# Altium PCB ATGuard Simple.PcbDoc
Units mm, origin at the board's own origin, x right, y up, seen from the top; angles counter-clockwise.
Board outline 100 x 19 mm, 2 copper layers (Top Layer, Bottom Layer), stack 1.071 mm thick; 82 components, 47 nets, 256 pads, 93 vias.
Unrouted connection lines stored in the file: 117.
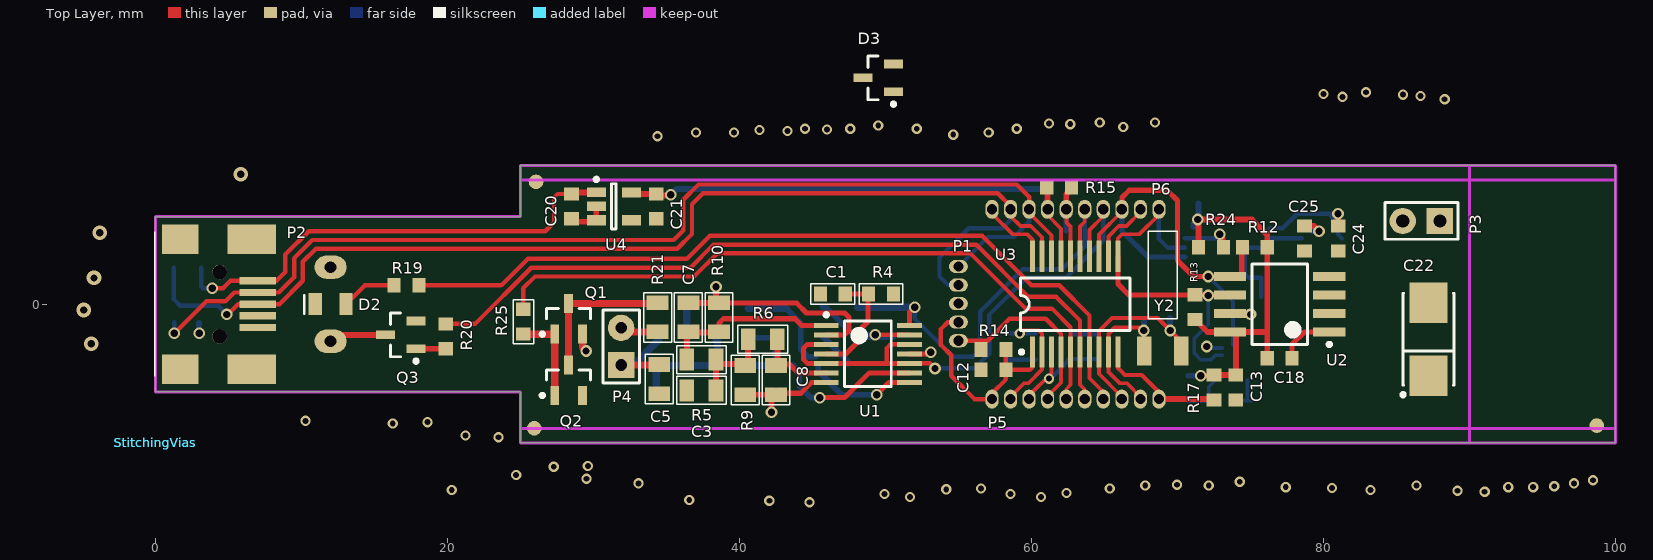
[diagram p0: Top Layer view]
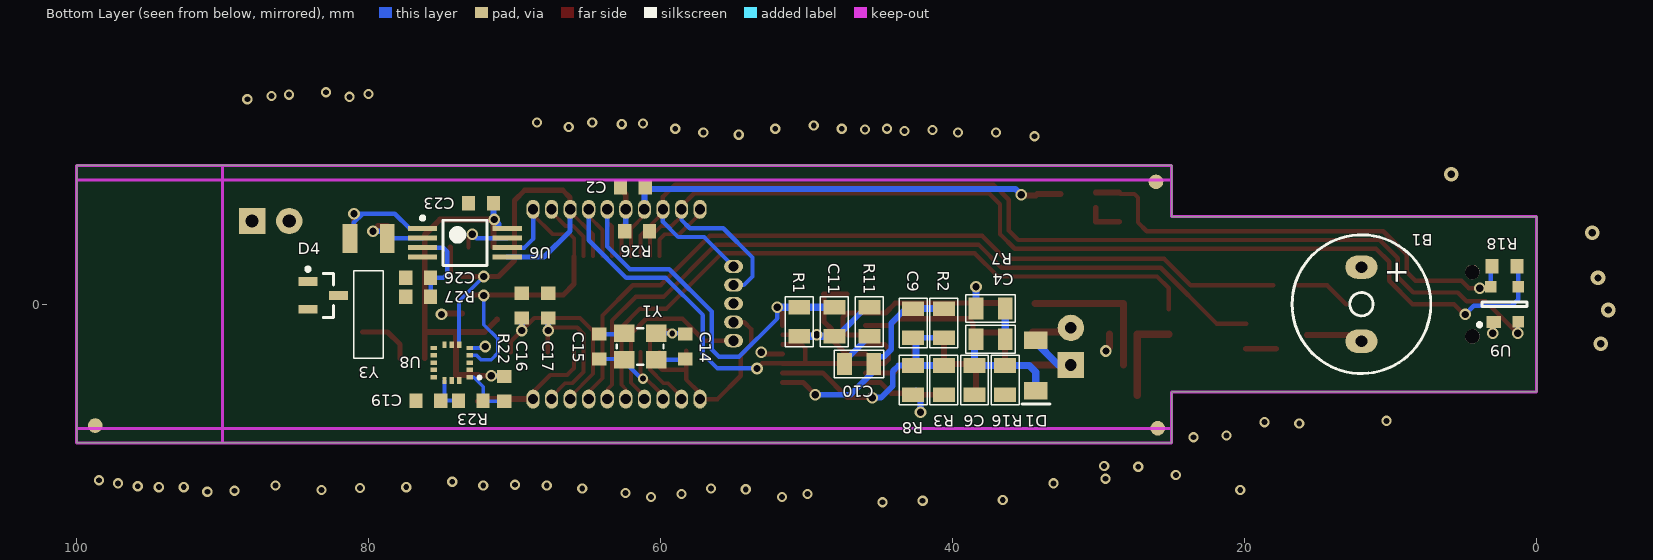
[diagram p1: Bottom Layer view, seen from below]
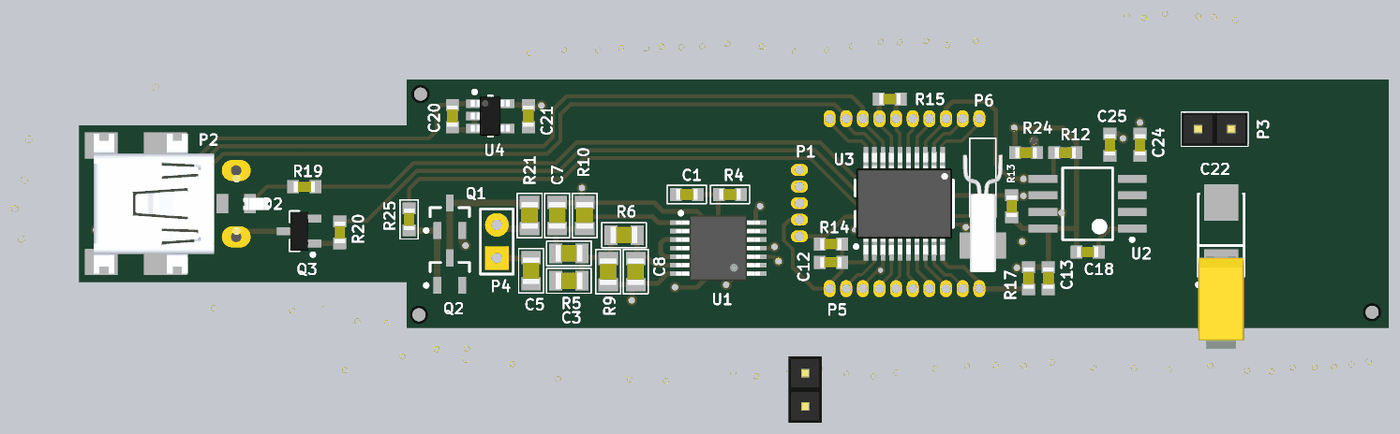
[diagram p2: 3D render of the assembled board from above, using the file's embedded part models]
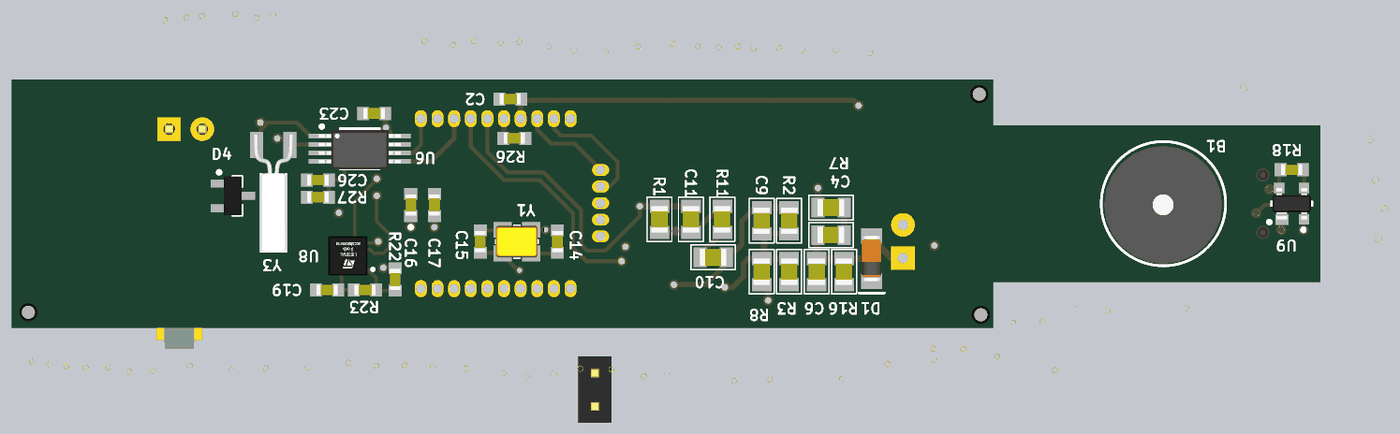
[diagram p3: 3D render of the assembled board from below, using the file's embedded part models]

## Layer stack, top to bottom
Top Layer: signal copper 0.0356
Dielectric: core 1, FR-4, Dk 4.8
Bottom Layer: signal copper 0.0356

## Board outline
0,6 25,6 25,9.5 100,9.5 100,-9.5 25,-9.5 25,-6 0,-6 0,6

## Design rules (kind name [scope] priority, off if disabled: settings)
Clearance Clearance_1 [InNamedPolygon('Direct Connect 8') Or  InNamedPolygon('Direct Connect 1') Or  InNamedPolygon('Direct Connect 11') Or  InNamedPolygon('Direct Connect 4') Or  InNamedPolygon('Direct Connect 5') Or  InNamedPolygon('Direct Connect 7') Or  InNamedPolygon('Direct Connect 10') Or  InNamedPolygon('Direct Connect 9') Or  InNamedPolygon('Direct Connect 2') Or  InNamedPolygon('Direct Connect 6') Or  InNamedPolygon('Direct Connect 3')] p1: gap=0.25
Clearance StitchingVias-Internal [InComponent('StitchingVias') vs InComponent('StitchingVias')] p2: gap=0 // Clearance between Stitching Vias
Clearance StitchingVias-Electrical [InComponent('StitchingVias') vs OnSignal] p3: gap=0 // Clearance between Stitching Vias and Electrical Objects
Clearance StitchingVias-Board [InComponent('StitchingVias') vs OnLayer('Keep-Out Layer')] p4: gap=0 // Clearance between Stitching Vias and Board Outline
Clearance [All] p5: gap=0.3
ComponentClearance StitchingVias-Comp [InComponent('StitchingVias')] p1: gap=0 collisioncheckmode=3 verticalgap=0 showdistances=FALSE // Clearance between "StitchingVias" Component and other Components
ComponentClearance [All] p2: gap=0.254 collisioncheckmode=3 verticalgap=0.254 showdistances=FALSE
HoleSize [All] p1: absolutevalues=TRUE maxlimit=2.54 minlimit=0.2 maxpercent=80.000 minpercent=20.000
HoleToHoleClearance [All] p1: gap=0.1 allowstackedmicrovias=TRUE
MinimumSolderMaskSliver [All] p1: minsoldermaskwidth=0
NetAntennae [All] p1: netantennaetolerance=0.1
PlaneClearance [All] p1: clearance=0.25
PlaneConnect StitchingVias-Plane [InComponent('StitchingVias')] p1: planeconnectstyle=Direct reliefexpansion=0.508 reliefentries=4 reliefconductorwidth=0.254 reliefairgap=0.254 // Power plane connect style rule for Stitching Vias
PlaneConnect [All] p2: planeconnectstyle=Relief reliefexpansion=0.508 reliefentries=4 reliefconductorwidth=0.254 reliefairgap=0.254
PolygonConnect PolygonConnect_3 [All vs IsNamedPolygon('Direct Connect 8') Or  IsNamedPolygon('Direct Connect 1') Or  IsNamedPolygon('Direct Connect 11') Or  IsNamedPolygon('Direct Connect 4') Or  IsNamedPolygon('Direct Connect 5') Or  IsNamedPolygon('Direct Connect 7') Or  IsNamedPolygon('Direct Connect 10') Or  IsNamedPolygon('Direct Connect 9') Or  IsNamedPolygon('Direct Connect 2') Or  IsNamedPolygon('Direct Connect 6') Or  IsNamedPolygon('Direct Connect 3')] p1: connectstyle=Direct reliefconductorwidth=0.254 reliefentries=4 polygonreliefangle="90 Angle"
PolygonConnect PolygonConnect_2 [All vs IsNamedPolygon('Top VBAT') Or  IsNamedPolygon('Bottom VBAT') Or  IsNamedPolygon('Top VBAT')] p2: connectstyle=Direct reliefconductorwidth=0.254 reliefentries=4 polygonreliefangle="90 Angle"
PolygonConnect StitchingVias-Poly [InComponent('StitchingVias')] p3: connectstyle=Direct reliefconductorwidth=0.254 reliefentries=4 polygonreliefangle="90 Angle" // Polygon connect style rule for Stitching Vias
PolygonConnect PolygonConnect_1 [All vs IsNamedPolygon('Top Full')] p4: connectstyle=Relief reliefconductorwidth=0.254 reliefentries=4 polygonreliefangle="90 Angle"
PolygonConnect [All] p5: connectstyle=Relief reliefconductorwidth=0.254 reliefentries=4 polygonreliefangle="90 Angle"
RoutingVias StitchingVias-ViaStyle [InComponent('StitchingVias')] p1: holewidth=0.4 width=0.6 viastyle="Through Hole" minholewidth=0.3 minwidth=0.5 maxholewidth=0.6 maxwidth=1 // Via style rule for Stitching Vias
RoutingVias [All] p2: holewidth=0.4 width=0.7 viastyle="Through Hole" minholewidth=0.4 minwidth=0.7 maxholewidth=0.711 maxwidth=1.27
SilkToSilkClearance [All] p1: silktosilkclearance=0
SilkscreenOverComponentPads [All] p1: minsilkscreentomaskgap=0
SolderMaskExpansion [All] p1: expansion=0
TestPointUsage [All] p1: valid=0 allowmultiple=FALSE
Testpoint [All] p1: side=15 testpointundercomponent=TRUE minsize=1.016 maxsize=2.54 preferedsize=1.524 minholesize=0 maxholesize=1.016 preferedholesize=0.813 testpointgrid=0.025 style=1023 order=0123456789
Width [All] p1: maxlimit=0.8 minlimit=0.2 preferedwidth=0.3
15 further rules are at their usual default settings.

## Classes and differential pairs
component class "AT Guard Simple Main": B1 C1 C2 C12 C13 C14 C15 C16 C17 D2 P1 P2 P5 P6 Q3 R4 R12 R13 R14 R15 R17 R18 R19 R20 R26 U3 U9 Y1 Y2
component class "AT Guard Simple Memory": C18 U2
component class "AT Guard Simple Mems": C19 R22 R23 U8
component class "AT Guard Simple Power": C20 C21 C22 D3 P3 U4
component class "AT Guard Simple RTC": C23 C24 C25 C26 D4 R24 R27 U6 Y3
component class RF_125KHz: C3 C4 C5 C6 C7 C8 C9 C10 C11 D1 P4 Q1 Q2 R1 R2 R3 R5 R6 R7 R8 R9 R10 R11 R16 R21 R25 U1

## Components (designator, comment, footprint, x,y, rotation, side; value= is the part's Value field where it differs from the comment)
B1 "Buzzer 5V r=12mm, h=7.5 mm" "Buzzer 9x5.5 mm" 12,0 r270 bottom
C1 "Cap" 3-0603_N 46.4,0.7 r0 top
C2 "Cap" 3-0603_L 61.9,8 r180 bottom
C3 "Cap" 6-0805_N 37.4,-5.9 r0 top
C4 "Cap" 6-0805_N 37.4,-2.4 r0 bottom
C5 "Cap" 6-0805_N 34.51,-5.13 r270 top
C6 "Cap" 6-0805_N 38.5,-5.2 r270 bottom
C7 "Cap" 6-0805_N 36.5,-0.9 r270 top
C8 "Cap" 6-0805_N 42.5,-5.2 r270 top
C9 "Cap" 6-0805_N 42.7,-1.3 r90 bottom
C10 "Cap" 6-0805_N 46.4,-4.1 r0 bottom
C11 "Cap" 6-0805_N 48.1,-1.2 r90 bottom
C12 "Cap" 3-0603_L 57.4,-4.5 r0 top
C13 "Cap" 3-0603_L 74,-5.7 r90 top
C14 "Cap" 3-0603_L 58.3,-2.9 r90 bottom
C15 "Cap" 3-0603_L 64.2,-2.9 r270 bottom
C16 "Cap" 3-0603_L 69.5,-0.1 r270 bottom
C17 "Cap" 3-0603_L 67.7,-0.1 r270 bottom
C18 "Cap" 3-0603_L 77,-3.7 r180 top
C19 "Cap" 3-0603_L 75.9,-6.6 r0 bottom
C20 "Cap" 3-0603_L 28.5,6.7 r90 top
C21 "Cap" 3-0603_L 34.3,6.7 r90 top
C22 "CAP-Tantal" C 87.2,-2.4 r90 top
C23 "Cap" 3-0603_L 72.3,6.9 r0 bottom
C24 "Cap" 3-0603_L 81,4.5 r90 top
C25 "Cap" 3-0603_L 78.7,4.5 r90 top
C26 "Cap" 3-0603_L 76.6,1.8 r180 bottom
D1 "LL4148" "DL-35 - S" 34.3,-4.2 r270 bottom
D2 "LED" "6-0805 - LED" 12,0 r180 top
D3 "BAT54C" SOT23_N 49.5,15.5 r180 top
D4 "BAT54C" SOT23_N 83.1,0.6 r180 bottom
P1 "Header 5pin" "Header 1.27mm 5P" 55,-2.5 r90 top
P2 "USB Mini B" "USB Mini B Female_N" -0.8,0 r270 top
P3 "Header 2H" "HDR1X2H-180 derece"#1 86.7,5.7 r180 top
P4 "Header 2H" "HDR1X2H-180 derece"#2 31.9,-2.89 r90 top
P5 "Header 10" "Header 1.27mm 10P" 57.3,-6.5 r0 top
P6 "Header 10" "Header 1.27mm 10P" 57.3,6.5 r0 top
Q1 "BSS84" SOT23_N 28.3,-1 r90 top
Q2 "2N7002" SOT23_N 28.3,-5.2 r90 top
Q3 "BC817-40" SOT23_N 16.8,-2.1 r180 top
R1 "Res1" 6-0805_N 50.5,-1.2 r90 bottom
R2 "Res1" 6-0805_N 40.6,-1.3 r270 bottom
R3 "Res1" 6-0805_N 40.6,-5.2 r270 bottom
R4 "Res1" 3-0603_N 49.7,0.7 r180 top
R5 "Res1" 6-0805_N 37.4,-3.8 r180 top
R6 "Res1" 6-0805_N 41.6,-2.4 r180 top
R7 "Res1" 6-0805_N 37.4,-0.3 r180 bottom
R8 "Res1" 6-0805_N 42.7,-5.2 r270 bottom
R9 "Res1" 6-0805_N 40.4,-5.2 r90 top
R10 "Res1" 6-0805_N 38.6,-0.9 r90 top
R11 "Res1" 6-0805_N 45.7,-1.2 r90 bottom
R12 "Res1" 3-0603_L 75.3,3.9 r0 top
R13 "Res1" 3-0603_L 71.2,-0.2 r270 top
R14 "Res1" 3-0603_L 57.4,-3.1 r0 top
R15 "Res1" 3-0603_L 61.9,8 r180 top
R16 "Res1" 6-0805_N 36.4,-5.2 r90 bottom
R17 "Res1" 3-0603_L 72.5,-5.7 r90 top
R18 "Res1" 3-0603_L 2.2,2.6 r0 bottom
R19 "Res1" 3-0603_L 17.2,1.3 r0 top
R20 "Res1" 3-0603_L 19.9,-2.2 r90 top
R21 "Res1" 6-0805_N 34.4,-0.9 r270 top
R22 "Res1" 3-0603_L 70.7,-5.8 r270 bottom
R23 "Res1" 3-0603_L 73,-6.6 r180 bottom
R24 "Res1" 3-0603_L 72.3,3.9 r0 top
R25 "Res1" 3-0603_N 25.2,-1.2 r270 top
R26 "Res1" 3-0603_L 61.6,5 r0 bottom
R27 "Res1" 3-0603_L 76.6,0.5 r180 bottom
StitchingVias "Component That Holds Stitching Vias" ? 0,-9.5 r0 top locked
StitchingVias "Component That Holds Stitching Vias" ? 0,-9.5 r0 top locked
StitchingVias "Component That Holds Stitching Vias" ? 0,-9.5 r0 top locked
StitchingVias "Component That Holds Stitching Vias" ? 0,-9.5 r0 top locked
StitchingVias "Component That Holds Stitching Vias" ? 0,-9.5 r0 top locked
U1 "#NAME?" TSSOP-14N 48.8,-3.4 r0 top
U2 "24FC1025-I/SM" SOIJ-SM8_N 77,0 r180 top
U3 "PIC18LF14K50-I/SS" SSOP-20 63,0 r0 top
U4 "TPS76933 3.3V LDO" SOT-23-CH5_M 31.4,6.7 r0 top
U6 "MCP79402" TSSOP-ST8_M 73.4,4.2 r180 bottom
U8 "LIS3DH" "LGA 16" 74.3,-4 r0 bottom
U9 "PRTR5V0U2X" SOT-143B 2.2,0 r270 bottom
Y1 "Crystal Oscillator" "3.2x2.5 mm SMD CRYSTAL" 61.4,-2.9 r0 bottom
Y2 "XTAL_SMT" "32768 SMT 2.1x6.2mm Crystal" 69,-3.2 r180 top
Y3 "XTAL_SMT" "32768 SMT 2.1x6.2mm Crystal" 80,4.5 r180 bottom

## Footprints (in the part's own frame and the unit in brackets; to place one, negate y for a bottom-side part, rotate by r counter-clockwise, add the part's x,y. Pads: shape width x height; smd on the part's side, far side on the other; paste and mask are expansions set on the pad)
3-0603_L [mm] "Chip Resistor; Body 1.6 x 0.9 mm (LxW typ)"
  rect 0.9x1 smd: 1(-0.85,0) 2(0.85,0)
  body extent -0.81,-0.41 0.81,0.41, height 0.46
3-0603_N [mm] "Chip Resistor; Body 1.6 x 0.9 mm (LxW typ)"
  rect 0.9x1 smd: 1(-0.85,0) 2(0.85,0)
  silkscreen extent -1.5,-0.7 1.5,0.7, body extent -0.81,-0.41 0.81,0.41, height 0.46
"3.2x2.5 mm SMD CRYSTAL" [mm] "3.2x2.5 mm SMD CRYSTAL"
  rect 1.4x1.2 smd: 1(-1.1,-0.9) 2(1.1,-0.9) 3(1.1,0.9) 4(-1.1,0.9)
  silkscreen extent -1.6,-1.25 1.6,1.25, body extent -1.6,-1.25 1.6,1.25, height 0.77
"6-0805 - LED" [mm] "Chip LED"
  rect 0.9x1.5 smd: 1(-1.05,0) 2(1.05,0)
  silkscreen extent 1.8,-0.6 1.8,0.65, body extent -1.03,-0.45 1.03,0.46, height 0.85
6-0805_N [mm] "Chip Resistor; Body 2 x 1.2 mm (LxW typ)"
  rect 1x1.5 smd: 1(-1,0) 2(1,0)
  silkscreen extent -1.7,-0.95 1.7,0.95, body extent -1.01,-0.63 1.01,0.64, height 0.61
"32768 SMT 2.1x6.2mm Crystal" [mm] "32768 SMT 2.1x6.2mm Crystal"
  rect 1x2 smd: 1(-1.27,0) 2(1.27,0)
  silkscreen extent -1,-8.2 1,-2.2, body extent -1.53,-8.17 1.53,0.81, height 2
"Buzzer 9x5.5 mm" [mm]
  oval 1.6x2.2 hole 0.8: 1(-2.54,0) 2(2.54,0)
  silkscreen extent -4.75,-4.75 4.75,4.75, body extent -4.41,-4.52 4.59,4.48, height 4.5
C [mm] "Capacitor, SM Tantalum; Body 6.0 x 3.2 mm (LxW typ)"
  rect 2.8x2.6 smd: 1(-2.5,0) 2(2.5,0)
  silkscreen extent -3.92,-1.75 3.15,1.87, body extent -3.8,-1.75 3.79,1.76, height 2.79
"DL-35 - S" [mm]
  rect 1.2x1.6 smd: 1(-1.725,0) 2(1.725,0)
  silkscreen extent 2.64,-0.95 2.64,0.98, body extent -1.76,-0.75 1.74,0.75, height 1.5
"HDR1X2H-180 derece"#1 [mm] "Connector; Header; 2 Position; Right Angle"
  rect 1.8x1.8 hole 0.9: 1(-1.27,0)
  round 1.8 hole 0.9: 2(1.27,0)
  silkscreen extent -2.5,-1.25 2.5,1.25, body extent -2.53,-1.28 2.55,1.26, height 8.49
"HDR1X2H-180 derece"#2 [mm] "Connector; Header; 2 Position; Right Angle"
  rect 1.8x1.8 hole 0.8: 1(-1.27,0)
  round 1.8 hole 0.8: 2(1.27,0)
  silkscreen extent -2.5,-1.25 2.5,1.25, body extent -2.53,-1.28 2.55,1.26, height 8.49
"Header 1.27mm 5P" [mm] "5 pin header 1.27mm"
  oval 0.9x1.3 hole 0.7: 1(0,0) 2(1.27,0) 3(2.54,0) 4(3.81,0) 5(5.08,0)
"Header 1.27mm 10P" [mm] "10 pin header 1.27mm"
  oval 0.9x1.3 hole 0.7: 1(0,0) 2(1.27,0) 3(2.54,0) 4(3.81,0) 5(5.08,0) 6(6.35,0) 7(7.62,0) 8(8.89,0) 9(10.16,0) 10(11.43,0)
"LGA 16" [mm] "LGA 16"
  rect 0.45x0.3 smd: 1(-1.225,1) 2(-1.225,0.5) 3(-1.225,0) 4(-1.225,-0.5) 5(-1.225,-1) 9(1.225,-1) 10(1.225,-0.5) 11(1.225,0) 12(1.225,0.5) 13(1.225,1)
  rect 0.3x0.45 smd: 6(-0.5,-1.225) 7(0,-1.225) 8(0.5,-1.225) 14(0.5,1.225) 15(0,1.225) 16(-0.5,1.225)
  silkscreen extent -2,0.93 -1.8,1.12, body extent -1.5,-1.5 1.5,1.5, height 1.01
SOIJ-SM8_N [mm] "SOP, 8-Leads, Body 5.2x5.2mm, Pitch 1.27mm, IPC Medium Density"
  rect 2.2x0.6 smd: 1(-3.4,1.905) 2(-3.4,0.635) 3(-3.4,-0.635) 4(-3.4,-1.905) 5(3.4,-1.905) 6(3.4,-0.635) 7(3.4,0.635) 8(3.4,1.905)
  silkscreen extent -3.52,-2.75 1.9,2.88, body extent -2.73,-2.75 2.73,2.75, height 2.04
SOT23_N [mm] "SOT23, 3-Leads, Body 2.9x1.3mm, Pitch 0.95mm, Lead Span 2.3mm, IPC Medium Density"
  rect 1.3x0.6 smd: 1(-1.05,0.95) 2(-1.05,-0.95) 3(1.05,0)
  silkscreen extent -1.18,-1.5 0.7,1.92, body extent -1.25,-1.5 1.25,1.5
SOT-23-CH5_M [mm] "SOT23, 6-Leads, Body 2.9x1.6mm, Pitch 0.95mm, Lead Span 2.7mm, IPC Low Density"
  rect 1.3x0.65 smd: 1(-1.2,0.95) 2(-1.2,0)
  rect 1.3x0.7 smd: 3(-1.2,-0.95) 4(1.2,-0.95) 5(1.2,0.95)
  silkscreen extent -1.32,-1.55 0.15,1.97, body extent -1.5,-1.49 1.5,1.51, height 1.3
SOT-143B [mm] "SOT143B"
  rect 0.8x1 smd: 1(1.22,-0.75)
  rect 0.8x0.8 smd: 2(1.2,0.95) 3(-1.2,0.95) 4(-1.2,-0.95)
  silkscreen extent -0.15,-1.84 1.53,1.55, body extent -1.21,-1.46 1.21,1.46, height 1
SSOP-20 [mm]
  rect 0.35x2.15 smd: 1(-2.925,-3.275) 2(-2.275,-3.275) 3(-1.625,-3.275) 4(-0.975,-3.275) 5(-0.325,-3.275) 6(0.325,-3.275) 7(0.975,-3.275) 8(1.625,-3.275) 9(2.275,-3.275) 10(2.925,-3.275) 11(2.925,3.275) 12(2.275,3.275) 13(1.625,3.275) 14(0.975,3.275) 15(0.325,3.275) 16(-0.325,3.275) 17(-0.975,3.275) 18(-1.625,3.275) 19(-2.275,3.275) 20(-2.925,3.275)
  silkscreen extent -3.8,-3.4 3.75,1.8, body extent -3.66,-3.95 3.66,3.95, height 1.78
TSSOP-14N [mm] "TSOP, 14-Leads, Body 4.5x4.3mm (max), Pitch 0.65mm, IPC Medium Density"
  rect 1.7x0.35 smd: 1(-2.85,1.95) 2(-2.85,1.3) 3(-2.85,0.65) 4(-2.85,0) 5(-2.85,-0.65) 6(-2.85,-1.3) 7(-2.85,-1.95) 8(2.85,-1.95) 9(2.85,-1.3) 10(2.85,-0.65) 11(2.85,0) 12(2.85,0.65) 13(2.85,1.3) 14(2.85,1.95)
  silkscreen extent -2.97,-2.25 1.6,2.8, body extent -3.2,-2.5 3.2,2.5, height 1.1
TSSOP-ST8_M [mm] "TSOP, 8-Leads, Body 3x4.4mm, Pitch 0.65mm, IPC Low Density"
  rect 2x0.35 smd: 1(-2.9,0.975) 2(-2.9,0.325) 3(-2.9,-0.325) 4(-2.9,-0.975) 5(2.9,-0.975) 6(2.9,-0.325) 7(2.9,0.325) 8(2.9,0.975)
  silkscreen extent -3.03,-1.55 1.5,1.82, body extent -3.14,-1.58 3.14,1.42, height 1.09
"USB Mini B Female_N" [mm] "USB Mini B Female Connector"
  round 1 hole 1 unplated: 0(-2.2,5.2) 0(2.2,5.2)
  rect 0.5x2.5 smd: 1(-1.6,7.8) 2(-0.8,7.8) 3(0,7.8) 4(0.8,7.8) 5(1.6,7.8)
  rect 2x3.3 smd: 6(-4.45,7.4) 6(4.45,7.4)
  rect 2x2.5 smd: 6(-4.45,2.5) 6(4.45,2.5)
  silkscreen extent -4.95,0.76 4.95,0.76, body extent -5.35,-0.7 5.35,8.5, height 3.95
? [mm]

## Part data
B1: library part Buzzer_
C1 C2 C3 C4 C5 C6 C7 C8 C9 C10 C11 C12 C13 C14 C15 C16 C17 C18 C19 C20 C21 C23 C24 C25 C26: "Capacitor"
C22: "Tantamount Military, Surface Mount MIL-PRF-55365/8 Qualified Solid Tantalum Chip Capacitor: 6.8uF, 20% Tolerance, 6 WVDC @ +85°C, Surge = 8V"
D1: "1 Amp General Purpose Rectifier"
D2: "Typical INFRARED GaAs LED"
D3 D4: "2x200 mA Shottky Rectifier"
P1: library part "Header 5 pin", "Header 5-Pin"
P3 P4: "Header, 2-Pin, Right Angle"
P5 P6: "Header, 10-Pin"
Q1: "P-channel Enhancement Mode Vertical D-MOSFET"
Q2: "N-channel Enhancement Mode Field-effect Transistor"
Q3: "NPN General-purpose Transistor"
R1 R2 R3 R4 R5 R6 R7 R8 R9 R10 R11 R12 R13 R14 R15 R16 R17 R18 R19 R20 R21 R22 R23 R24 R25 R26 R27: "Resistor"
U1: library part LMV324IPWR, "IC OPAMP GP R-R 1MHZ 14TSSOP"
U2: "1 Mbit, 1MHz, 2.5V, I2C Serial EEPROM, 8-Pin SOIC 208mil, Industrial Temperature"
U3: "High Performance, Enhanced FLASH Microcontroller with 10-Bit A/D and nanoWatt Technology, 8K FLASH, 20-Pin SSOP, Standard Volt Range, Industrial Temperature"
U6: "MCP79402 RTC,I2C"
U8: "3-axis - ±2g analog output “nano” accelerometer"
U9: "Ultra low capacitance double rail-to-rail ESD protection diode"
Y2 Y3: "Crystal Oscillator"

## Free pads (board coordinates)
  round 1 smd mask+0.2: 0(25.95,-8.5) 0(26.07,8.38) 0(98.72,-8.31)
  round 1 smd far side mask+0.2: 0(25.95,-8.5) 0(26.07,8.38) 0(98.72,-8.31)

## Via types
v1: diameter 0.7, hole 0.4, Top Layer to Bottom Layer, tented both sides, 63 vias
v2: diameter 0.8, hole 0.5, Top Layer to Bottom Layer, tented both sides, 25 vias
v3: diameter 1, hole 0.5, Top Layer to Bottom Layer, tented both sides, 5 vias

## Nets (pads, with @x,y where several pads share a name; then routed paths per layer and width w, separated by ;. In a path a pad name is that pad's centre, name@x,y a point inside that pad or via, vN(x,y) a via of type N, cw(c..) or ccw(c..) an arc to the next point about the centre after c; other vN are vias at no path point)
2: C14.2 P5.2 U3.2 Y1.1 | length 9.2
  Top Layer w0.25: P5.2 58.57,-6.333 59.478,-5.425 59.779,-5.425 60.725,-4.479 U3.2 60.725,-2.025 60.475,-1.775 59.425,-1.775 v1(59.2,-2)
  Bottom Layer w0.3: C14.2@58.35,-2 Y1.1
3: C15.2 P5.3 U3.3 Y1.3 | length 7.4
  Top Layer w0.25: P5.3 59.84,-6.26 61.375,-4.725 U3.3
  Bottom Layer w0.3: v1(61.2,-5.1) 61.3,-5.1 62.5,-3.9 Y1.3 ; Y1.3@62.85,-3.75 C15.2@64.5,-3.75
4: P1.1 P5.4 R14.1 U3.4 | length 12.9
  Top Layer w0.25: P5.4 61.11,-6.29 62.025,-5.375 U3.4
  Top Layer w0.3: P1.1 57,-2.5 58.5,-1 60.986,-1 62.025,-2.039 U3.4
5: P5.5 R25.1 U3.5 | length 47.1
  Top Layer w0.25: P5.5@62.4,-6.5 P5.5 62.38,-5.82 62.675,-5.525 U3.5
  Top Layer w0.3: R25.1 25.2,1.103 25.997,1.9 36.897,1.9 38.477,3.48 55.82,3.48 59.6,-0.3 61.4,-0.3 62.675,-1.575 U3.5
6: P5.6 R20.2 U3.6 | length 53.3
  Top Layer w0.25: U3.6 63.325,-5.525 63.65,-5.85 P5.6
  Top Layer w0.3: R20.2 21.899,-1.35 25.749,2.5 36.649,2.5 38.229,4.08 56.22,4.08 59.8,0.5 61.7,0.5 63.325,-1.125 U3.6
7: P5.7 R19.2 U3.7 | length 55.7
  Top Layer w0.25: U3.7 63.975,-5.075 64.92,-6.02 P5.7
  Top Layer w0.3: R19.2 23.7,1.3 25.5,3.1 36.4,3.1 37.98,4.68 56.62,4.68 60,1.3 61.9,1.3 63.975,-0.775 U3.7
8: C16.2 P5.8 U3.8 Y2.1 | length 13.6
  Top Layer w0.25: U3.8 64.625,-4.768 66.19,-6.333 P5.8
  Top Layer w0.3: U3.8 64.625,-1.84 65.515,-0.95 68.65,-0.95 70.27,-2.57 Y2.1@70.27,-3.3
  Bottom Layer w0.4: v2(69.5,-1.8) C16.2
9: C17.2 P5.9 U3.9 Y2.2 | length 10.5
  Top Layer w0.25: U3.9 65.275,-4.64 66.06,-5.425 66.552,-5.425 67.46,-6.333 P5.9
  Top Layer w0.3: U3.9 65.275,-2.039 65.714,-1.6 67.4,-1.6 67.73,-1.93 Y2.2@67.73,-3.3
  Bottom Layer w0.4: v2(67.7,-1.8) C17.2@67.7,-1.05
10: P5.10 R17.1 U3.10 | length 8.9
  Top Layer w0.3: U3.10 65.925,-4.375 66.4,-4.85 67.55,-4.85 68.73,-6.03 P5.10
  Top Layer w0.4: P5.10 72.35,-6.5 R17.1@72.5,-6.65
11: P6.10 R13.1 U2.6 U3.11 U6.6 U8.4 | length 25.6
  Top Layer w0.25: U3.11 65.9,3.3 65.9,4.487 66.213,4.8 67.4,4.8 68.73,6.13 P6.10
  Top Layer w0.35: U3.11 65.925,1.375 66.665,0.635 72.1,0.635 U2.6
  Bottom Layer w0.25: v2(72.1,0.6) 72.1,-1.4 71.15,-2.35 71.15,-3.35 71.6,-3.8 72.3,-3.8 72.6,-3.5 U8.4
  Bottom Layer w0.3: P6.10 68.73,4.47 69.325,3.875 U6.6 U6.6@70.475,3.9
12: P6.9 R4.1 U3.12 | length 4.4
  Top Layer w0.25: U3.12 65.275,4.64 65.985,5.35 66.513,5.35 P6.9@67.46,6.297
  Top Layer w0.3: P6.9@67.46,6.297 P6.9
13: P6.8 R12.1 U2.5 U3.13 U6.5 U8.6 | length 31
  Top Layer w0.25: U3.13 64.625,4.768 66.19,6.333 P6.8 P6.8@66.2,6.51
  Top Layer w0.35: P6.8@66.2,6.51 66.2,7.3 66.7,7.8 69.3,7.8 70,7.1 70,3 71.1,1.9 v2(72.1,1.9) U2.5@73.595,1.9 ; U2.5@74.4,1.9 R12.1@74.4,3.9
  Bottom Layer w0.25: v2(72.1,1.9) 73.8,0.2 U8.6
  Bottom Layer w0.35: P6.8 66.19,5.01 67.975,3.225 U6.5
14: P6.7 U1.3 U1.5 U1.10 U1.12 U3.14 | length 37.1
  Top Layer w0.25: U3.14 63.975,5.075 64.92,6.02 P6.7
  Top Layer w0.3: 50.1,-4.05 50.1,-3 50.35,-2.75 U1.12 U1.12@51.625,-2.775 ; U1.10 53.05,-4.05 v2(53.4,-4.4)
  Top Layer w0.35: 44.903,-4.05 44.65,-4.05 ; U1.3 44.65,-2.75 44.4,-3 44.4,-3.8 44.65,-4.05 ; U1.10 50.1,-4.05 U1.5 44.65,-4.05
  Bottom Layer w0.3: v2(53.4,-4.4) 56.1,-4.4 57.1,-3.4 57.1,-0.749 59.649,1.8 62.349,1.8 64.92,4.371 P6.7
15: C11.2 P6.6 R1.2 U1.14 U3.15 | length 29.4
  Top Layer w0.25: U3.15 63.325,5.325 63.65,5.65 P6.6
  Top Layer w0.35: U1.14 51.65,-0.55 v2(52,-0.2)
  Bottom Layer w0.3: v2(52,-0.2) 52,-0.973 54.627,-3.6 56,-3.6 56.5,-3.1 56.5,-0.5 59.4,2.4 62.1,2.4 63.65,3.95 P6.6
  Bottom Layer w0.5: C11.2 R1.2 v2(52,-0.2)
16: P6.5 R15.1 R26.2 U3.16 | length 6.2
  Top Layer w0.25: P6.5 62.4,6.48 62.4,5.6 62.675,5.325 ; U3.16@62.675,3.375 62.675,5.3
  Top Layer w0.4: P6.5 62.38,7.53 R15.1@62.75,7.9
  Bottom Layer w0.4: R26.2@62.38,5.03 P6.5
18: P1.5 P2.2 P6.3 U3.18 U9.2 | length 77.5
  Top Layer w0.25: P6.3 59.84,6.26 61.375,4.725 U3.18
  Top Layer w0.3: v2(1.3,-2) 3.5,0.2 4.8,0.2 5.4,0.8 P2.2 8.451,0.8 9.5,1.849 9.5,3.149 10.751,4.4 35.5,4.4 36.15,5.05 36.15,7.15 ; 36.15,7.148 36.15,7.15 ; P6.3 59.84,7.36 59,8.2 37.2,8.2 36.15,7.15
  Bottom Layer w0.3: v2(1.3,-2) U9.2@1.3,-1.25 ; P1.5 57.02,4.6 58.8,4.6 59.84,5.64 P6.3
19: P1.4 P2.3 P6.2 R18.1 U3.19 U9.3 | length 80.1
  Top Layer w0.25: P6.2 58.57,6.03 59.25,5.35 59.95,5.35 60.725,4.575 U3.19
  Top Layer w0.3: v2@4.7,-0.7 v2(4.9,-0.7) 4.964,-0.7 5.664,0 P2.3 8.5,0 10.1,1.6 10.1,2.9 11,3.8 35.749,3.8 36.75,4.801 36.75,6.85 37.5,7.6 57.7,7.6 58.57,6.73 P6.2
  Bottom Layer w0.3: R18.1@1.25,2.5 U9.3 1.25,0.35 1.7,-0.1 4.3,-0.1 v2(4.9,-0.7) ; P1.4 54.29,1.31 53.7,1.9 53.7,3.2 55.7,5.2 58,5.2 58.57,5.77 P6.2
+VBAT: B1.1 C12.2 C19.1 C22.1 D3.3 D4.1 P1.2 P3.1 P5.1 Q1.2 R14.2 R23.1 U3.1 U8.8 U8.14 | length 18.6
  Top Layer w0.3: P1.2 54.27,-1.23 53.8,-1.7 53.8,-2.8 54.5,-3.5 54.5,-4.9 56.1,-6.5 P5.1 57.3,-6.1 58.25,-5.15 C12.2@58.25,-4.533 ; R14.2@58.25,-3.2 C12.2 ; U3.1 60.075,-4.316 59.891,-4.5 C12.2@58.283,-4.5 ; C12.2@58.25,-4.533 C12.2 ; C12.2@58.25,-4.533 C12.2@58.283,-4.5 ; C12.2 C12.2@58.283,-4.5
  Top Layer w0.5: Q1.2 29.25,-2.95 v2(29.5,-3.2)
  Bottom Layer w0.25: C19.1@74.8,-6.35 U8.14
  Bottom Layer w0.3: R23.1 C19.1
+VCCI2C: C13.2 C18.2 C23.1 R12.2 R13.2 R17.2 R22.1 R24.1 U2.8 U6.8 | length 28.4
  Top Layer w0.4: R13.2 72.055,-1.905 U2.8 76.1,-1.905 ; R24.1 71.45,5.65 71.6,5.8 75.1,5.8 76.15,4.75 R12.2 C18.2 ; v2(71.6,-4.9) R17.2@72.45,-4.9 ; R17.2 C13.2 U2.8@74,-2
  Bottom Layer w0.4: R22.1@70.75,-4.9 v2(71.6,-4.9) ; U6.8@71.1,5.3 71.1,5.5 v2(71.4,5.8) ; v2@71.45,5.85 C23.1
+VCCRF: C1.2 R4.2 U1.4 | length 7.7
  Top Layer w0.35: U1.4 47.3,-3.4 48.3,-2.4 48.3,-1.7 48.8,-1.2 R4.2@48.8,0.7 ; C1.2 R4.2@48.8,0.7 ; R4.2 R4.2@48.8,0.7
+VUSB: C2.2 C21.2 D3.1 P6.4 R15.2 U3.17 U4.5 | length 34.8
  Top Layer w0.25: P6.4 61.11,6.09 62.025,5.175 U3.17
  Top Layer w0.4: U4.5@32.6,7.55 C21.2@34.2,7.55 ; C21.2@34.3,7.45 v2@35.25,7.45 ; R15.2@61.1,7.85 61.1,6.51 P6.4
  Bottom Layer w0.4: v2(35.3,7.5) 35.7,7.9 61,7.9 61.11,7.79 P6.4
GND: C1.1 C2.1 C3.1 C5.2 C6.2 C12.1 C13.1 C14.1 C15.1 C16.1 C17.1 C18.1 C19.2 C20.1 C21.1 C22.2 C23.2 C24.1 C25.1 C26.1 D2.2 P1.3 P2.5 P2.6 P3.2 P6.1 Q2.2 Q3.2 R3.2 R16.1 R26.1 U1.11 U2.1 U2.2 U2.3 U2.4 U2.7 U3.20 U4.2 U4.3 U6.4 U8.5 U8.7 U8.10 U8.12 U9.1 Y1.2 Y1.4 | length 19.6
  Top Layer w0.25: P6.1 57.3,6.2 58.7,4.8 59.7,4.8 60.075,4.425 U3.20
  Top Layer w0.35: U1.11 v2@52.9,-3.4 ; C18.1 77.85,-2.75 78.695,-1.905 U2.1
  Top Layer w0.4: C20.1@28.6,5.65 30.2,5.65 U4.2@30.2,6.6 ; U2.7 75.035,-0.635 v2@75.1,-0.7
  Bottom Layer w0.25: v2(72,-2.9) 72.1,-3 U8.5
  Bottom Layer w0.3: C14.1@58.35,-3.8 Y1.4 ; Y1.2@62.85,-2.05 C15.1@64.5,-2.05
  Bottom Layer w0.4: v2(3,-2) U9.1@3,-1.27
  other v1: 44.8,-13.56 42.05,-13.46 36.56,-13.41 51.69,-13.2 60.65,-13.2 49.93,-12.99 58.57,-12.99 62.41,-12.94 91.04,-12.84 89.18,-12.78 20.3,-12.73 83.22,-12.73 54.17,-12.68 56.55,-12.63 65.36,-12.63 80.58,-12.58 77.42,-12.53 92.65,-12.53 94.36,-12.53 95.81,-12.47 67.79,-12.42 72.14,-12.42 86.38,-12.42 69.97,-12.37 33.09,-12.27 97.15,-12.27 74.27,-12.16 98.45,-12.06 29.52,-11.96 24.71,-11.7 27.29,-11.13 23.51,-9.11 21.24,-9 16.26,-8.18 18.63,-8.08 10.29,-7.99 34.39,11.5 54.64,11.61 37.03,11.76 39.62,11.76 57.07,11.76 43.3,11.87 41.38,11.92 45.99,11.97 44.49,12.02 47.59,12.02 52.15,12.02 58.99,12.02 66.29,12.13 49.51,12.23 62.66,12.33 61.21,12.38 64.68,12.44 68.46,12.44
  other v2: 53.1,-3.3 75,-0.7
  other v3: -4.4,-2.7 -4.9,-0.4 -4.2,1.8 -3.8,4.9 5.85,8.89
NetB1_2: B1.2 Q3.3 | length 3.9
  Top Layer w0.4: B1.2 12.44,-2.1 Q3.3
NetC3_2: C3.2 R5.1 R6.2 R9.2 | length 5.3
  Top Layer w0.4: C3.2 R5.1 ; R5.1@38.7,-4.1 40.2,-4.1 R9.2@40.3,-4.2 ; R9.2@40.6,-4.2 R6.2@40.6,-2.6
NetC4_1: C4.1 R7.2 | length 2.2
  Bottom Layer w0.4: R7.2@36.38,-0.3 R7.2@36.38,-0.15
  Bottom Layer w0.5: C4.1 R7.2
NetC4_2: C4.2 C6.1 D1.2 R16.2 | length 8
  Bottom Layer w0.4: C6.1@38.26,-4.2 C6.1@38.38,-4.08 ; C4.2@38.38,-2.4 C4.2@38.38,-2.05
  Bottom Layer w0.5: D1.2 34.3,-4.64 34.74,-4.2 R16.2 38.26,-4.2 C6.1 38.5,-2.5 C4.2
NetC5_1: C5.1 D1.1 P4.1 | length 6
  Top Layer w0.4: C5.1@34.48,-4.16 C5.1
  Top Layer w0.5: P4.1 C5.1@34.48,-4.16
  Bottom Layer w0.4: D1.1@34.412,-2.512 D1.1@34.52,-2.405
  Bottom Layer w0.5: P4.1 32.765,-4.16 D1.1@34.412,-2.512
NetC7_1: C7.1 R7.1 R10.2 U1.2 | length 16.7
  Top Layer w0.35: R10.2@38.32,0.07 43.93,0.07 44.6,-0.6 47.2,-0.6 47.5,-0.9 47.5,-1.8 47.2,-2.1 46.997,-2.1 U1.2
  Top Layer w0.4: C7.1@36.42,0.07 R10.2@38.32,0.07 ; R10.2@38.35,0.1 38.4,0.15 v2@38.4,1.3
  Bottom Layer w0.4: R7.1@38.38,-0.15 R7.1@38.4,-0.13
  Bottom Layer w0.5: R7.1@38.4,-0.13 v2@38.4,1.3
  other v2: 38.4,1.2
NetC7_2: C7.2 R5.2 R10.1 U1.1 | length 12.2
  Top Layer w0.35: R10.1 38.6,-1.3 38.9,-1 43.8,-1 44.25,-1.45 U1.1
  Top Layer w0.4: R5.2 36.4,-1.95 36.42,-1.93 38.32,-1.93 R10.1@38.47,-1.93
NetC8_1: C8.1 R6.1 U1.6 | length 5.5
  Top Layer w0.35: C8.1@42.2,-4.2 C8.1@42.3,-4.3 ; C8.1@42.2,-4.1 43.4,-4.1 44,-4.7 U1.6
  Top Layer w0.4: C8.1@42.6,-4.1 R6.1@42.6,-2.7
NetC8_2: C8.2 R8.2 R9.1 U1.7 | length 8.7
  Top Layer w0.35: C8.2@42.2,-6.1 44.2,-6.1 44.95,-5.35 U1.7
  Top Layer w0.4: R9.1@40.3,-6.2 42,-6.2 42.2,-6.4 v2(42.2,-7.4)
  Bottom Layer w0.4: v2(42.2,-7.4) 42.2,-6.2 R8.2@42.5,-5.9
NetC9_1: C9.1 R2.2 R3.1 R8.1 U1.9 | length 16.9
  Top Layer w0.35: v2(45.5,-6.4) 47.2,-6.4 48.9,-4.7 U1.9
  Bottom Layer w0.4: R3.1@40.6,-3.9 R3.1@40.9,-4.2 ; R2.2 C9.1@42.5,-2.3 ; R8.1@42.6,-4.2 R8.1@42.7,-4.1 ; R8.1 43.7,-4.2 44.1,-4.6 44.1,-5.6 44.9,-6.4 v2(45.5,-6.4)
  Bottom Layer w0.5: R3.1@40.9,-4.2 R8.1@42.6,-4.2 ; R8.1@42.5,-3.9 C9.1@42.5,-2.3
NetC9_2: C9.2 C10.1 R2.1 U1.8 | length 14.8
  Top Layer w0.35: v2(49.4,-6.2) 50.25,-5.35 U1.8
  Bottom Layer w0.4: C9.2@43.2,-0.3 44.2,-1.3 44.2,-3.1 44.7,-3.6 C10.1@45.2,-3.6 ; C10.1 45.4,-4.6 47,-6.2 v2(49.4,-6.2)
  Bottom Layer w0.5: R2.1 C9.2@43.2,-0.3
  other v1: 81.31,14.2 80.01,14.4 82.91,14.51
NetC10_2: C10.2 R11.1 | length 2.6
  Bottom Layer w0.4: R11.1 47.4,-3.9 C10.2
NetC11_1: C11.1 R1.1 R11.2 U1.13 | length 7.8
  Top Layer w0.3: v2(49.3,-2.1) U1.13
  Bottom Layer w0.4: R11.2 45.9,-0.2 47.9,-2.2 C11.1@47.95,-2.2
  Bottom Layer w0.5: C11.1 R1.1
NetC20_2: C20.2 P2.1 R18.2 U4.1 U9.4 | length 32.9
  Top Layer w0.3: v2@4.3,1.1 v2(3.9,1.1) 4.644,1.1 5.143,1.6 P2.1 8.3,1.6 8.9,2.2 8.9,3.397 10.503,5 26.7,5 27.3,5.6 27.3,7.3 27.55,7.55 C20.2
  Top Layer w0.4: C20.2@28.6,7.65 U4.1
  Bottom Layer w0.3: U9.4 R18.2@3.15,2.5 ; U9.4@3.25,1.1 v2(3.9,1.1)
NetC24_2: C24.2 U6.1 Y3.1 | length 8
  Top Layer w0.4: C24.2 v2(81,6.2)
  Bottom Layer w0.3: U6.1 76.325,5.2 77.2,5.2 78.2,6.2 80.4,6.2 ; v2(81,6.2) 80.4,6.2 ; Y3.1 81,4.77 81,5.6 80.4,6.2
NetC25_2: C25.2 U6.2 Y3.2 | length 3.8
  Top Layer w0.4: C25.2 79.35,5.35 v2(79.7,5)
  Bottom Layer w0.3: U6.2 Y3.2@78.505,4.525
  Bottom Layer w0.4: Y3.2@79.23,5 v2(79.7,5)
NetC26_2: C26.2 R27.2 U6.3 | length 5.9
  Bottom Layer w0.3: R27.2 C26.2 74.9,1.8 74.6,2.1 74.6,3.6 74.875,3.875 U6.3
NetD2_1: D2.1 R19.1 | length 3.8
  Top Layer w0.3: D2.1 14.35,1.3 R19.1
NetD4_3: D4.3 R27.1
NetP4_2: P4.2 R21.2 | length 2.3
  Top Layer w0.5: P4.2@32.19,-1.91 R21.2@34.51,-1.91
NetQ1_1: Q1.1 Q2.1 R25.2 | length 6.3
  Top Layer w0.5: R25.2 Q1.1 Q2.1
NetQ1_3: Q1.3 Q2.3 R21.1 | length 10.2
  Top Layer w0.5: Q2.3 Q1.3 R21.1@34.35,0.05
NetQ3_1: Q3.1 R20.1 | length 2
  Top Layer w0.4: Q3.1 R20.1
NetR22_2: R22.2 R23.2 U8.1 | length 3.5
  Bottom Layer w0.25: R22.2 R23.2@72.1,-6.65 ; R23.2 72.15,-5.65 72.8,-5 U8.1
NetR24_2: R24.2 U6.7 | length 3.5
  Top Layer w0.3: v2(72.9,4.8) 73.15,4.55 R24.2
  Bottom Layer w0.3: U6.7 72.625,4.525 v2(72.9,4.8)
pads on no net: D3.2 D4.2 P2.0 P2.4 U4.4 U8.2 U8.3 U8.9 U8.11 U8.13 U8.15 U8.16
copper on no net:
  other v1: 29.62,-11.09 88.3,14.04 86.64,14.25 85.45,14.35

## Keep-outs
Keep-Out Layer:
  lines w0.2: 25,-8.5 100,-8.5 ; 25,8.5 100,8.5 ; 90,-9.5 90,9.5 ; 0,-6 25,-6 25,-9.5 100,-9.5 100,9.5 25,9.5 25,6 0,6 0,-6

## Text inside footprints (layer, text, board x,y; h text height)
B1: Bottom Overlay "+" at 10.232,3.055 h1.52 r90